# Altium PCB nRF24AP2 Asynchronous.PcbDoc
Units mil, origin at the board's own origin, x right, y up, seen from the top; angles counter-clockwise.
Board outline 2166 x 1594 mil, 2 copper layers (Top Layer, Bottom Layer); 20 components, 20 nets, 75 pads, 41 vias.
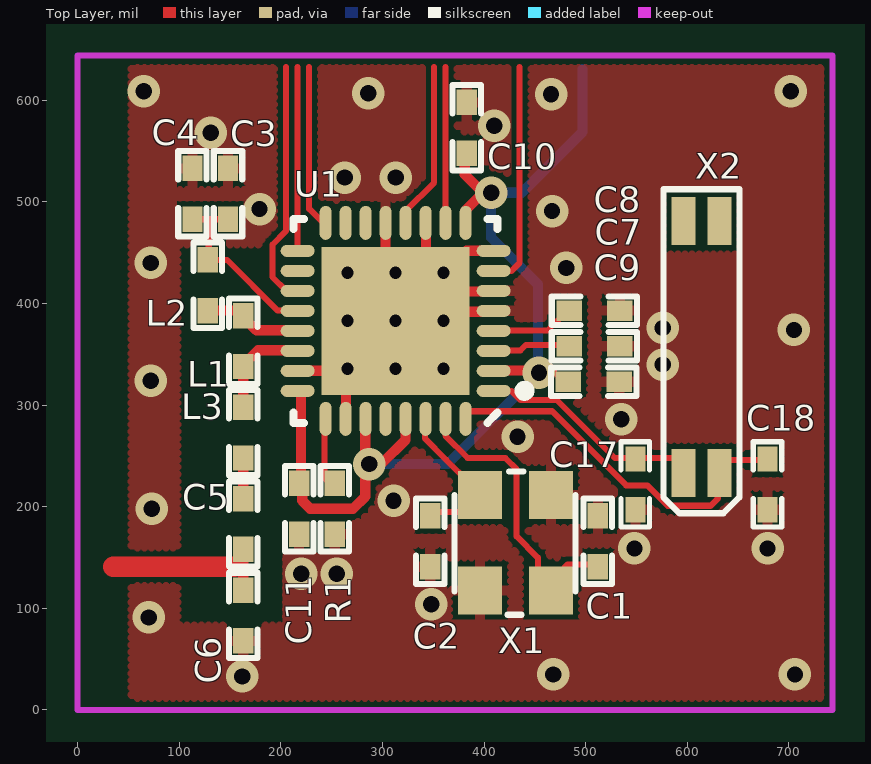
[diagram p0: Top Layer view]
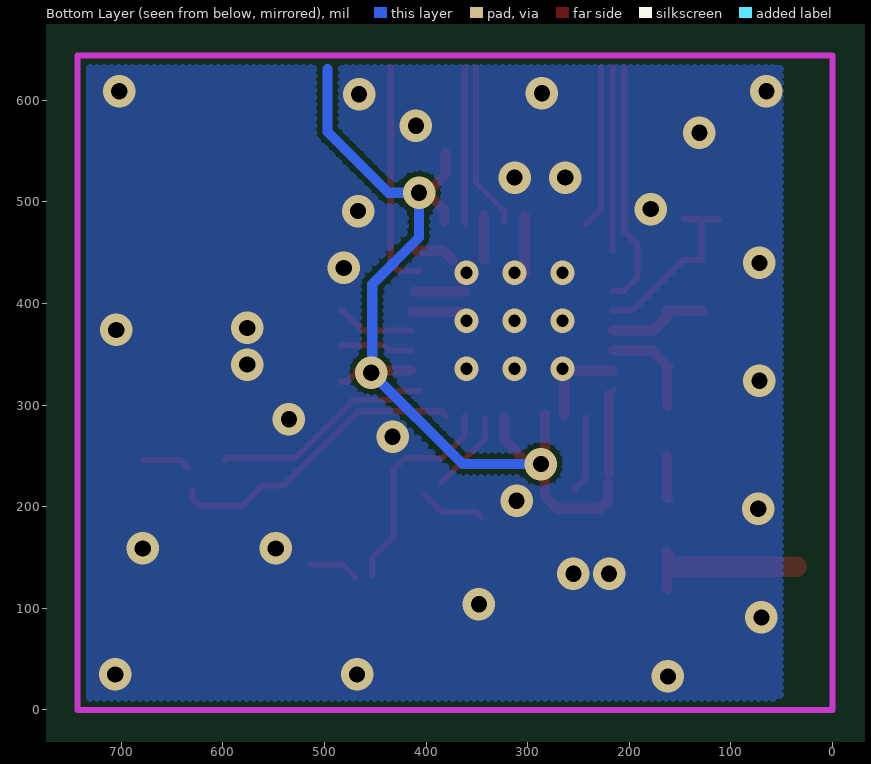
[diagram p1: Bottom Layer view, seen from below]

## Layer stack, top to bottom
Top Layer: signal copper 1.4
Dielectric: dielectric 12.6, FR-4, Dk 4.8
Bottom Layer: signal copper 1.4

## Board outline
-347,-417 -347,1177 1819,1177 1819,-417

## Design rules (kind name [scope] priority, off if disabled: settings)
Clearance [All] p1: gap=5
ComponentClearance [All] p1 off: gap=10 collisioncheckmode=3 verticalgap=10
Height [All] p1 off: minheight=0 maxheight=1000 prefheight=500
PolygonConnect PolygonConnect_1 [isVia and innet(gnd)] p1: connectstyle=Direct reliefconductorwidth=10 reliefentries=4 polygonreliefangle="90 Angle"
PolygonConnect [All] p2: connectstyle=Relief reliefconductorwidth=10 reliefentries=4 polygonreliefangle="90 Angle"
RoomDefinition "nRF24AP2 Asynchronous" [InComponentClass('nRF24AP2 Asynchronous')] p1 off: confinementstyle=ConfineIn formatcopy=TRUE lockcomponents=FALSE outline -2895.21,-3562 -895.21,-3562 -895.21,-2562 -2895.21,-2562
RoutingVias [All] p1: holewidth=16 width=32 viastyle="Through Hole" minholewidth=10 minwidth=10 maxholewidth=28 maxwidth=50
SolderMaskExpansion [All] p1: expansion=4
TestPointUsage [All] p1: valid=0 allowmultiple=FALSE
Testpoint [All] p1: side=15 testpointundercomponent=TRUE minsize=40 maxsize=100 preferedsize=60 minholesize=0 maxholesize=40 preferedholesize=32 testpointgrid=1 style=1023 order=0-112345678
Width [All] p1: maxlimit=100 minlimit=1 preferedwidth=10 toplayer_prefwidth=6 bottomlayer_prefwidth=6 minimp=50.000000 maximp=50.000000 favimp=50.000000
17 further rules are at their usual default settings.

## Components (designator, comment, footprint, x,y, rotation, side; value= is the part's Value field where it differs from the comment)
C1 "NP0 50V" 0402s 512,166 r270 top
C2 "NP0 50V" 0402s 347,166 r90 top
C3 "X7R 16V" 0402s 148,508 r270 top
C4 "NP0 50V" 0402s 113,508 r270 top
C5 "NP0 +/-0.1pF, 50V" 0402s 163,183 r90 top
C6 "NP0 +/-0.1pF, 50V" 0402s 163,93 r270 top
C7 "X7R 16V" 0402s 508.67,358 r180 top
C8 "X7R 16V" 0402s 508.67,393 r180 top
C9 "X7R 16V" 0402s 508,323 r180 top
C10 "X7R 16V" 0402s 383,573 r270 top
C11 "X7R 16V" 0402s 218,198 r270 top
C17 "NP0 50V" 0402s 549,222 r90 top
C18 "NP0 50V" 0402s 679,222 r90 top
L1 "Murata LQP15MN6N8B02D" 0402s 163,363 r270 top
L2 "Murata LQP15MN6N8B02D" 0402s 128,418 r270 top
L3 "Murata LQP15MN4N7B02D" 0402s 163,273 r270 top
R1 "1%" 0402s 253,198 r270 top
U1 "nRF24AP2" Nordic_QFN50P500X500X90-33N 313,383 r180 top
X1 "16MHz, Cl=9pF, +/-10ppm" "bt-xtal 3225" 451,117.67 r90 top
X2 "MC-146, 32.768kHz, Cl=9pF, +/-50ppm" MC-146 614,357 r90 top

## Footprints (in the part's own frame and the unit in brackets; to place one, negate y for a bottom-side part, rotate by r counter-clockwise, add the part's x,y. Pads: shape width x height; smd on the part's side, far side on the other; paste and mask are expansions set on the pad)
0402s [mil]
  rect 25x20 smd: 1(-25,0) 2(25,0)
  silkscreen extent -42,-14 42,14
"bt-xtal 3225" [mm] "Mercury X32 series"
  rect 1.2x1.1 smd: 1(0,-0.381) 2(2.388,-0.381) 3(2.388,1.397) 4(0,1.4)
  silkscreen extent -0.61,-0.99 2.97,2.03
MC-146 [mm] "32.768kHz crystal"
  rect 1.2x0.6 smd: 1(-3.15,0.45) 2(3.15,0.45) 3(-3.15,-0.45) 4(3.15,-0.45)
  silkscreen extent -4.15,-0.95 3.95,0.95
Nordic_QFN50P500X500X90-33N [mm] "QFN32 5x5x0.85mm, 0.5mm pitch - Medium Density"
  oval 0.85x0.3 smd mask+0.076: 1(-2.45,1.75) 2(-2.45,1.25) 3(-2.45,0.75) 4(-2.45,0.25) 5(-2.45,-0.25) 6(-2.45,-0.75) 7(-2.45,-1.25) 8(-2.45,-1.75) 17(2.45,-1.75) 18(2.45,-1.25) 19(2.45,-0.75) 20(2.45,-0.25) 21(2.45,0.25) 22(2.45,0.75) 23(2.45,1.25) 24(2.45,1.75)
  oval 0.3x0.85 smd mask+0.076: 9(-1.75,-2.45) 10(-1.25,-2.45) 11(-0.75,-2.45) 12(-0.25,-2.45) 13(0.25,-2.45) 14(0.75,-2.45) 15(1.25,-2.45) 16(1.75,-2.45) 25(1.75,2.45) 26(1.25,2.45) 27(0.75,2.45) 28(0.25,2.45) 29(-0.25,2.45) 30(-0.75,2.45) 31(-1.25,2.45) 32(-1.75,2.45)
  rect 3.7x3.7 smd mask+0: 33(0,0)
  silkscreen extent -3.35,-2.55 2.55,2.55

## Part data
C1 C2 C3 C4 C5 C6 C7 C8 C9 C10 C11 C17 C18: library part Cap, "Capacitor"
L1 L2 L3: library part Inductor, "Inductor"
R1: library part Res2, "Resistor"
U1: library part "nRF24LE1 - 5x5", "2.4GHz Tranceiver with embedded MCU and 10 bit ADC"
X1: library part BT-XTAL, "Crystal"
X2: library part XTAL, "Crystal Oscillator"

## Via types
v1: diameter 32, hole 16, Top Layer to Bottom Layer, tented both sides, 32 vias
v2: diameter 24, hole 12, Top Layer to Bottom Layer, tented both sides, 9 vias

## Nets (pads, with @x,y where several pads share a name; then routed paths per layer and width w, separated by ;. In a path a pad name is that pad's centre, name@x,y a point inside that pad or via, vN(x,y) a via of type N, cw(c..) or ccw(c..) an arc to the next point about the centre after c; other vN are vias at no path point)
GND: C1.1 C2.1 C3.1 C4.1 C6.2 C7.1 C8.1 C9.1 C10.1 C11.2 C17.1 C18.1 R1.2 U1.5 U1.6 U1.8 U1.11 U1.13 U1.23 U1.26 U1.33 X1.2 X1.4 | length 323.9
  Top Layer w10: U1.23 264.21,333.79 U1.33@266,332 ; U1.26@264,290 U1.33@264,326 ; U1.33@303,429 U1.13@303,486 ; U1.33@343,443 U1.11@343,488 ; U1.33@362,412 U1.6@411,412 ; U1.33@366,392 U1.5@414,392 ; U1.33@374,443 383,452 U1.8@409,452
  other v1: 162,33 468,35 706,35 70,91 348,104 220,134 255,134 548,159 679,159 73,198 311,206 433,269 535,286 72,324 576,340 705,374 576,376 481,435 72,440 467,491 179,493 263,524 313,524 131,568 410,575 466,606 286,607 65,609 702,609
  other v2: 265.76,335.76 313,335.76 360.24,335.76 265.76,383 313,383 360.24,383 265.76,430.24 313,430.24 360.24,430.24
NetC1_2: C1.2 U1.31 X1.1 | length 264.3
  Top Layer w6: U1.31@362,289 362,270 384,248 421,248 432,237 432,171 453,150 X1.1@453,133 ; X1.1@470,131 482,143 C1.2@514,143
NetC2_2: C2.2 U1.30 X1.3 | length 143.8
  Top Layer w6: U1.30@342,287 342,267 362.5,246.5 ; C2.2@346,190 351,195 385,195 X1.3@401,211 ; 363,246 X1.3@385,224
NetC3_2: C3.2 C4.2 L2.1 U1.20 | length 196.4
  Top Layer w6: C4.2@112,483 146,483 C3.2@147,484 ; L2.1 147,443 197,393 U1.20@217,393 ; L2.1@129,444 129,483 ; U1.20@203.53,393.47 U1.20@215.84,393.47
NetC5_1: C5.1 C6.1 | length 194.2
  Top Layer w10: 128,140 163,140 ; C5.1@160,153 C5.1@162,155 ; C6.1@162,119 163,120 C5.1@163,156
  Top Layer w20: 35,141 154,141
NetC5_2: C5.2 L3.2 | length 42.4
  Top Layer w10: C5.2@162,208 163,209 L3.2@163,250
NetC7_2: C7.2 U1.3 | length 71.9
  Top Layer w6: U1.3@414.5,353.79 435.79,353.79 441.2,359.2 482.47,359.2 C7.2
NetC8_2: C8.2 U1.4 | length 77.3
  Top Layer w6: U1.4@414.5,373.47 462.47,373.47 482,393 C8.2
NetC17_2: C17.2 U1.1 X2.1 | length 218.2
  Top Layer w6: U1.1@406,314 427,314 436,305 471.79,305 528.79,248 C17.2@549,248 ; C17.2@551,248 596,248 X2.1@598,246
NetC18_2: C18.2 U1.32 X2.3 | length 347.5
  Top Layer w6: U1.32@381,290 385,294 467,294 540,221 560.79,221 580.89,200.89 ; 580.79,201 623,201 630,208 X2.3@630,216 ; X2.3@634,238 642,246 C18.2@678,246
NetL1_1: L1.1 L2.2 U1.21 | length 96.5
  Top Layer w10: L2.2 163,393 L1.1@164,392 ; L1.1@161.67,388 175.88,373.79 U1.21@215.84,373.79
NetL1_2: L1.2 L3.1 U1.22 | length 100.3
  Top Layer w10: L1.2@161.67,338 177.77,354.1 U1.22@215.84,354.1 ; L3.1@162,299 163,300 L1.2
NetR1_1: R1.1 U1.25 | length 76
  Top Layer w6: U1.25@242,288 243,287 243,238 243,228 R1.1@254,217
NetU1_7: U1.7 | length 224.6
  Top Layer w6: U1.7@407,433 408,432 427,432 434.79,439.79 434.79,633
NetU1_10: U1.10 | length 154
  Top Layer w6: U1.10@362,479 362,633
NetU1_12: U1.12 | length 164.5
  Top Layer w6: U1.12@323,480 323,491.21 350.79,519 350.79,633
NetU1_16: U1.16 | length 161.3
  Top Layer w6: 227.79,633 227.79,493.21 U1.16@243,478
NetU1_17: U1.17 | length 181.1
  Top Layer w6: U1.17 216.54,633
NetU1_19: U1.19 | length 242.8
  Top Layer w6: 205,633 205,471.21 191.79,458 191.79,426 205.26,412.53 U1.19
VCC_NRF: C9.2 C10.2 C11.1 U1.2 U1.9 U1.24 U1.27 U1.29 | length 1062
  Top Layer w6: U1.24@215.84,314.73 U1.24@220,310.58 ; v1@279,248 281,248 v1(287,242) ; v1@466.9,334.1 478,323 C9.2@483.67,323
  Top Layer w10: C11.1@220,232 U1.24@220,310.58 ; C11.1@221,223 221,206 229,198 271,198 283,210 U1.27@283,291 ; v1@286,242 298.84,242 322.84,266 323,286.54 U1.29@323,287 ; C10.2@381,548 381,527 399,509 382,492 U1.9@382,481 ; U1.2@414.5,334.1 v1@466.9,334.1
  Bottom Layer w10: v1(287,242) 364,242 453,331 453,419 407,465 v1@407,508 ; v1(407,509) 437,509 497,569 497,631
  other v1: 454,332
pads on no net: U1.14 U1.15 U1.18 U1.28 X2.2 X2.4

## Polygon pours and split planes (outlines as drawn)
GND on Top Layer "Bottom Layer-No Net" (hatched 90Degree grid 7 track 8, remove dead copper, pour order 1000): 52.86,1277 52.86,-488 45,-496 54.83,-486 1954,-486 1954,1196 1913.72,1237
GND on Bottom Layer "Bottom Layer-No Net" (hatched 90Degree grid 7 track 8, remove dead copper, pour order 1001): 51.86,1277 51.86,-488 44,-496 53.83,-486 1954,-486 1954,1196 1913.7,1237

## Keep-outs
Keep-Out Layer:
  lines w6: 0,0 743,0 743,644 0,644 0,0

## Other copper
Top Layer:
  pour cut-out: 390,497 432,497 432,457 390,457
  pour cut-out: 98,458 205,458 205,83 98,83
  pour cut-out: 258.5,269 269.5,269 269.5,265 258.5,265